# Altium PCB CAR PCB.PcbDoc
Units mm, origin at the board's own origin, x right, y up, seen from the top; angles counter-clockwise.
Board outline 175.18 x 129.51 mm, 2 copper layers (F.Cu, B.Cu); 27 components, 83 nets, 179 pads, 279 vias.
Unrouted connection lines stored in the file: 35.
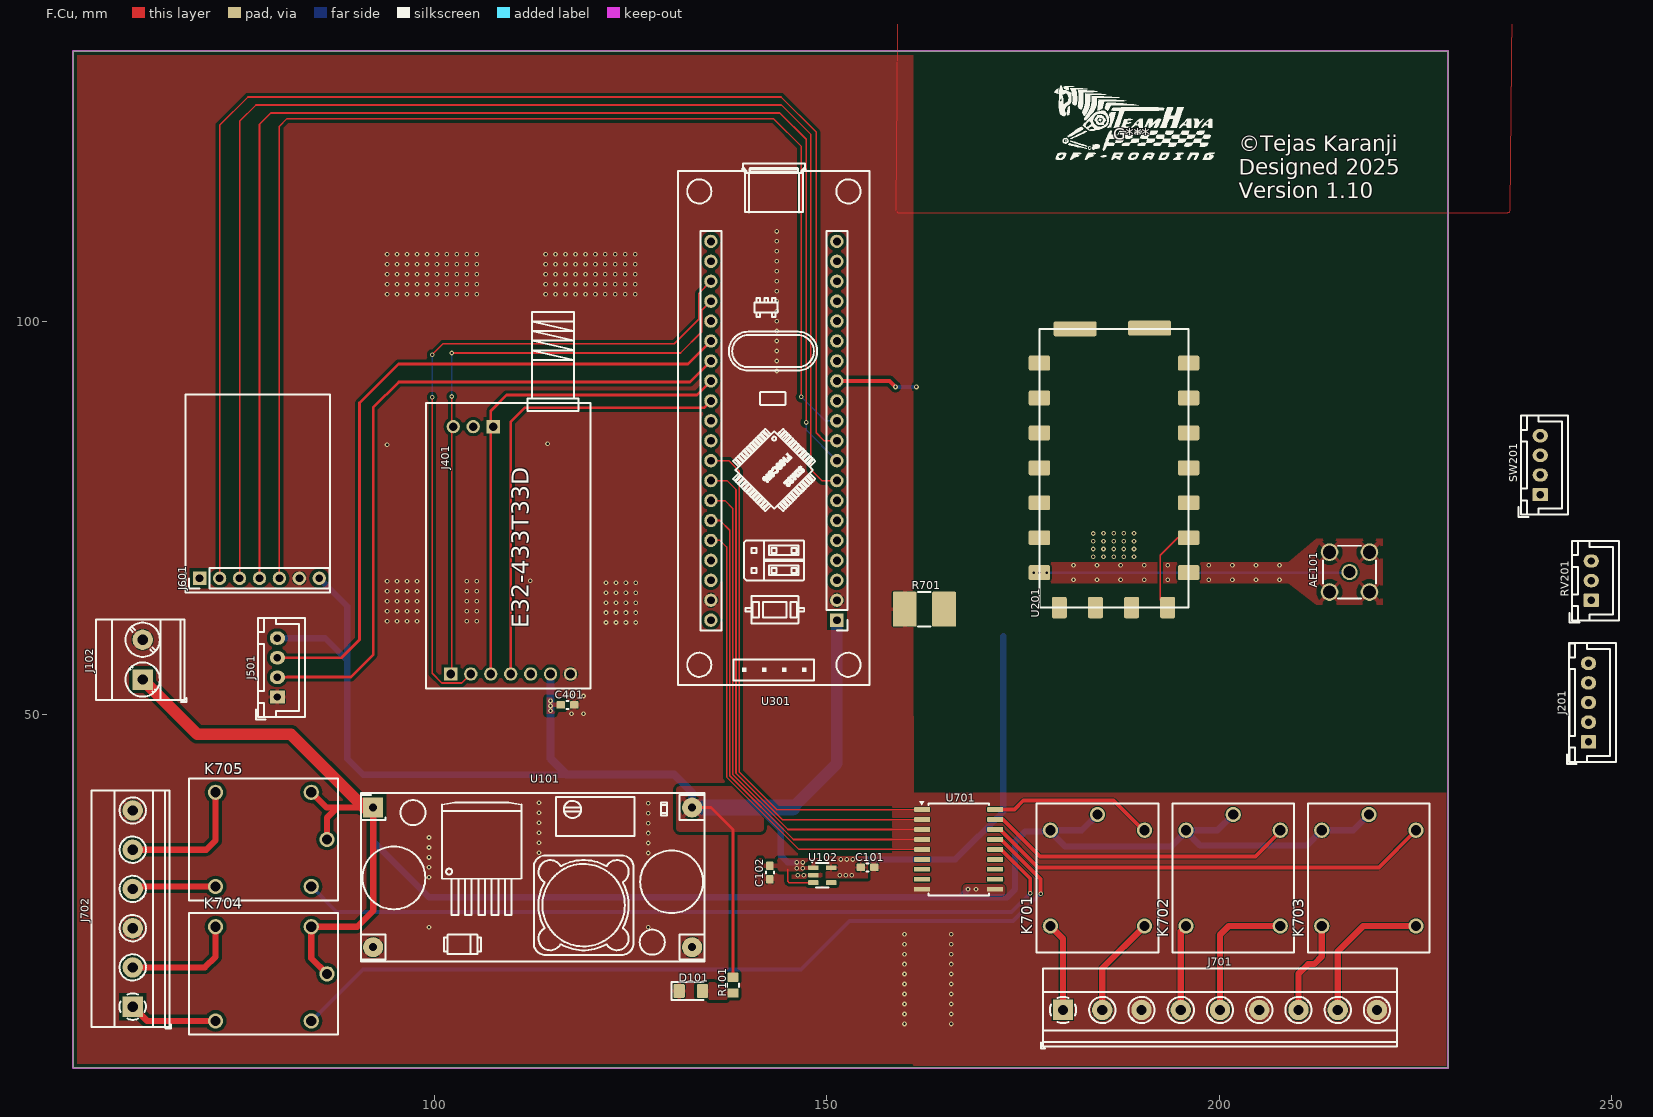
[diagram p0: F.Cu view]
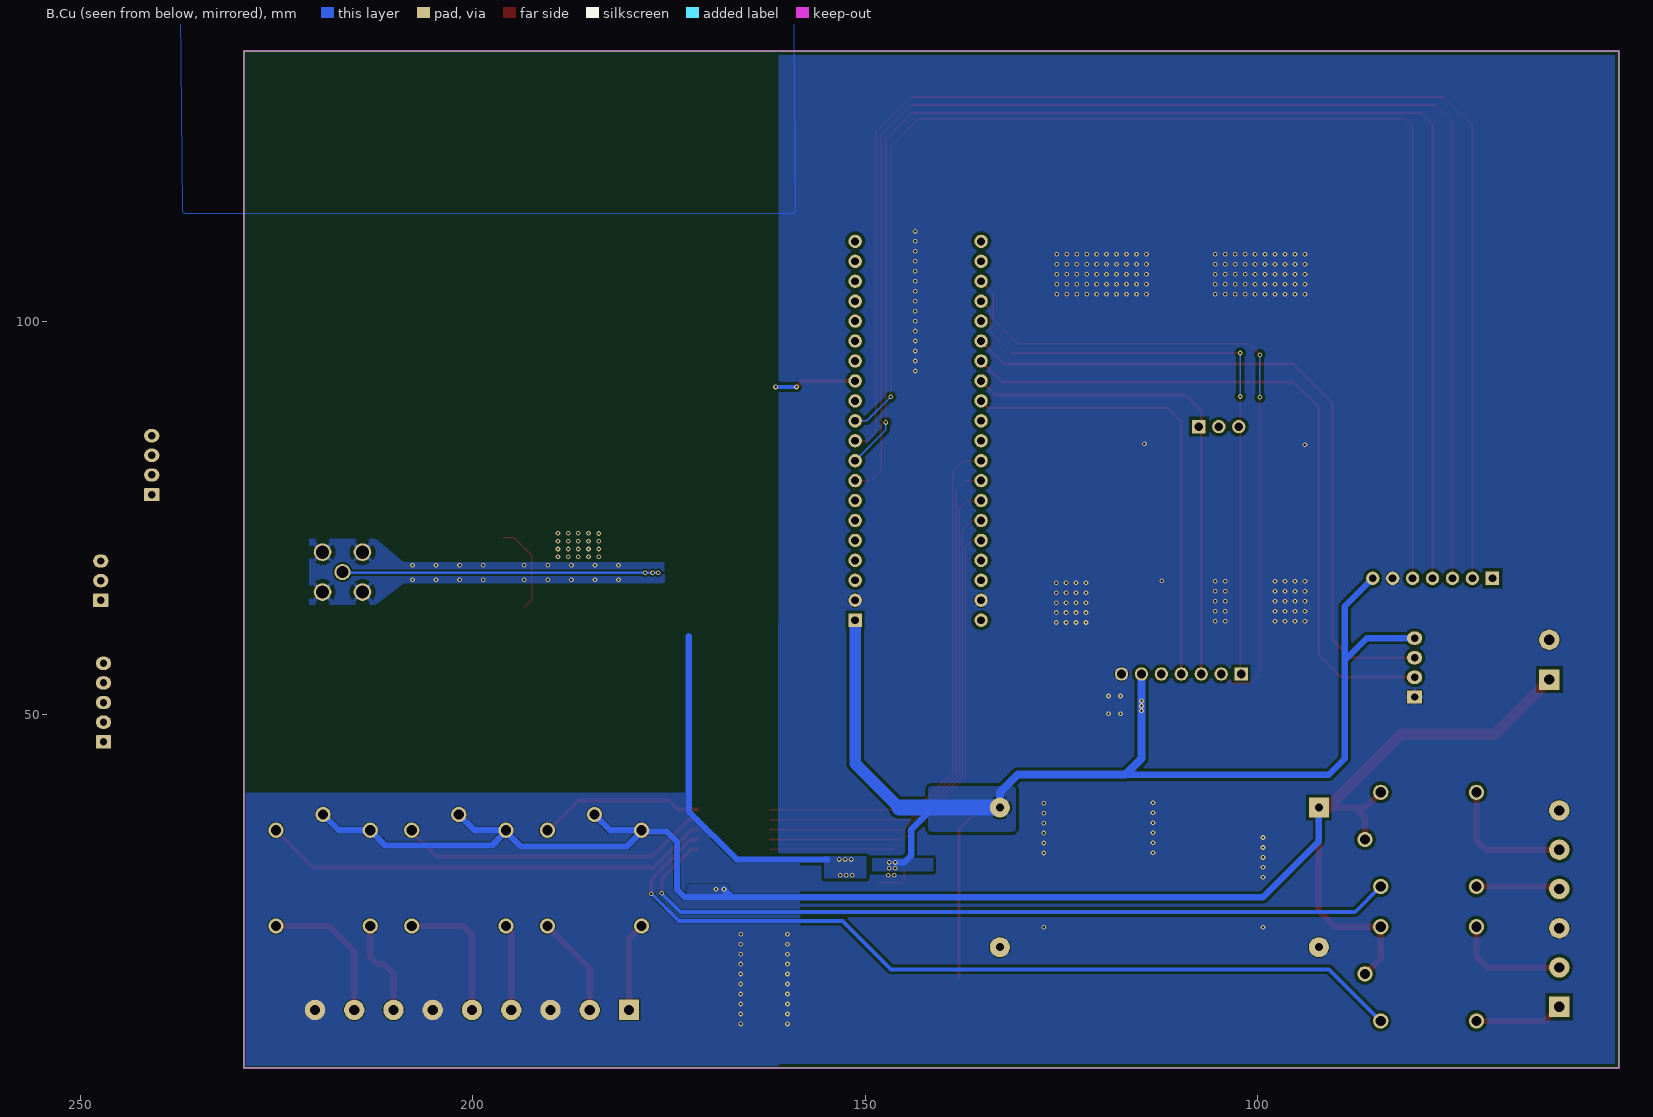
[diagram p1: B.Cu view, seen from below]

## Layer stack, top to bottom
F.Mask: solder mask 0.0102, Solder Resist, Dk 3.5
F.Cu: signal copper 0.0356
Dielectric 1: dielectric 0.32, FR-4, Dk 4.8
B.Cu: signal copper 0.0356
B.Mask: solder mask 0.0102, Solder Resist, Dk 3.5

## Board outline
53.988,134.468 53.988,4.953 229.171,4.953 229.171,134.468 53.988,134.468

## Design rules (kind name [scope] priority, off if disabled: settings)
Clearance "Clearence 0.4_Polygon" [InNamedPolygon('F.Cu-Net-(D101-A)') OR InNamedPolygon('F.Cu-GNDD') OR InNamedPolygon('B.Cu-GNDD')] p1: gap=0.4 ignorepadtopadclearanceinfootprint=FALSE
Clearance "Clearence 0.25_Polygon" [InNamedPolygon('F.Cu-5V') OR InNamedPolygon('F.Cu-GNDA') OR InNamedPolygon('B.Cu-GNDA') OR InNamedPolygon('F.Cu-5V-1') OR InNamedPolygon('B.Cu-5V') OR InNamedPolygon('F.Cu-5V-2') OR InNamedPolygon('B.Cu-5V-1')] p2: gap=0.25 ignorepadtopadclearanceinfootprint=FALSE
Clearance "Clearence 0.15_Polygon" [InNamedPolygon('F.Cu-3.3V') OR InNamedPolygon('B.Cu-3.3V')] p3: gap=0.15 ignorepadtopadclearanceinfootprint=FALSE
Clearance "Clearence 0.1_Polygon" [InNamedPolygon('F.Cu-+12V') OR InNamedPolygon('B.Cu-+12V') OR InNamedPolygon('F.Cu-GNDD-1') OR InNamedPolygon('B.Cu-GNDD-1') OR InNamedPolygon('F.Cu-GNDD-2') OR InNamedPolygon('B.Cu-GNDD-2')] p4: gap=0.1 ignorepadtopadclearanceinfootprint=FALSE
MinimumSolderMaskSliver [All] p1: minsoldermaskwidth=0
PolygonConnect Polygon_B.Cu-3.3V_ConnectDirect [IsNamedPolygon('B.Cu-3.3V') vs IsVia] p1: connectstyle=Direct reliefconductorwidth=0.254 reliefentries=4 polygonreliefangle="90 Angle" airgapwidth=0.254
PolygonConnect Polygon_B.Cu-3.3V_ConnectRelief45 [IsNamedPolygon('B.Cu-3.3V') vs (IsThruPin or IsSMTPin) and (PadShape_AllLayers = 'Round')] p2: connectstyle=Relief reliefconductorwidth=0.3 reliefentries=4 polygonreliefangle="45 Angle" airgapwidth=0.15
PolygonConnect Polygon_B.Cu-3.3V_ConnectRelief90 [IsNamedPolygon('B.Cu-3.3V') vs (IsThruPin or IsSMTPin) and (PadShape_AllLayers <> 'Round')] p3: connectstyle=Relief reliefconductorwidth=0.3 reliefentries=4 polygonreliefangle="90 Angle" airgapwidth=0.15
PolygonConnect Polygon_F.Cu-3.3V_ConnectDirect [IsNamedPolygon('F.Cu-3.3V') vs IsVia] p4: connectstyle=Direct reliefconductorwidth=0.254 reliefentries=4 polygonreliefangle="90 Angle" airgapwidth=0.254
PolygonConnect Polygon_F.Cu-3.3V_ConnectRelief45 [IsNamedPolygon('F.Cu-3.3V') vs (IsThruPin or IsSMTPin) and (PadShape_AllLayers = 'Round')] p5: connectstyle=Relief reliefconductorwidth=0.3 reliefentries=4 polygonreliefangle="45 Angle" airgapwidth=0.15
PolygonConnect Polygon_F.Cu-3.3V_ConnectRelief90 [IsNamedPolygon('F.Cu-3.3V') vs (IsThruPin or IsSMTPin) and (PadShape_AllLayers <> 'Round')] p6: connectstyle=Relief reliefconductorwidth=0.3 reliefentries=4 polygonreliefangle="90 Angle" airgapwidth=0.15
PolygonConnect Polygon_B.Cu-GNDD-2_ConnectDirect [IsNamedPolygon('B.Cu-GNDD-2')] p7: connectstyle=Direct reliefconductorwidth=0.254 reliefentries=4 polygonreliefangle="90 Angle" airgapwidth=0.254
PolygonConnect Polygon_F.Cu-GNDD-2_ConnectDirect [IsNamedPolygon('F.Cu-GNDD-2')] p8: connectstyle=Direct reliefconductorwidth=0.254 reliefentries=4 polygonreliefangle="90 Angle" airgapwidth=0.254
PolygonConnect Polygon_B.Cu-GNDD-1_ConnectDirect [IsNamedPolygon('B.Cu-GNDD-1')] p9: connectstyle=Direct reliefconductorwidth=0.254 reliefentries=4 polygonreliefangle="90 Angle" airgapwidth=0.254
PolygonConnect Polygon_F.Cu-GNDD-1_ConnectDirect [IsNamedPolygon('F.Cu-GNDD-1')] p10: connectstyle=Direct reliefconductorwidth=0.254 reliefentries=4 polygonreliefangle="90 Angle" airgapwidth=0.254
PolygonConnect Polygon_B.Cu-GNDD_ConnectDirect [IsNamedPolygon('B.Cu-GNDD') vs IsVia] p11: connectstyle=Direct reliefconductorwidth=0.254 reliefentries=4 polygonreliefangle="90 Angle" airgapwidth=0.254
PolygonConnect Polygon_B.Cu-GNDD_ConnectRelief45 [IsNamedPolygon('B.Cu-GNDD') vs (IsThruPin or IsSMTPin) and (PadShape_AllLayers = 'Round')] p12: connectstyle=Relief reliefconductorwidth=0.5 reliefentries=4 polygonreliefangle="45 Angle" airgapwidth=0.1
PolygonConnect Polygon_B.Cu-GNDD_ConnectRelief90 [IsNamedPolygon('B.Cu-GNDD') vs (IsThruPin or IsSMTPin) and (PadShape_AllLayers <> 'Round')] p13: connectstyle=Relief reliefconductorwidth=0.5 reliefentries=4 polygonreliefangle="90 Angle" airgapwidth=0.1
PolygonConnect Polygon_F.Cu-GNDD_ConnectDirect [IsNamedPolygon('F.Cu-GNDD') vs IsVia] p14: connectstyle=Direct reliefconductorwidth=0.254 reliefentries=4 polygonreliefangle="90 Angle" airgapwidth=0.254
PolygonConnect Polygon_F.Cu-GNDD_ConnectRelief45 [IsNamedPolygon('F.Cu-GNDD') vs (IsThruPin or IsSMTPin) and (PadShape_AllLayers = 'Round')] p15: connectstyle=Relief reliefconductorwidth=0.5 reliefentries=4 polygonreliefangle="45 Angle" airgapwidth=0.1
PolygonConnect Polygon_F.Cu-GNDD_ConnectRelief90 [IsNamedPolygon('F.Cu-GNDD') vs (IsThruPin or IsSMTPin) and (PadShape_AllLayers <> 'Round')] p16: connectstyle=Relief reliefconductorwidth=0.5 reliefentries=4 polygonreliefangle="90 Angle" airgapwidth=0.1
PolygonConnect Polygon_B.Cu-5V-1_ConnectDirect [IsNamedPolygon('B.Cu-5V-1') vs IsVia] p17: connectstyle=Direct reliefconductorwidth=0.254 reliefentries=4 polygonreliefangle="90 Angle" airgapwidth=0.254
PolygonConnect Polygon_B.Cu-5V-1_ConnectRelief45 [IsNamedPolygon('B.Cu-5V-1') vs (IsThruPin or IsSMTPin) and (PadShape_AllLayers = 'Round')] p18: connectstyle=Relief reliefconductorwidth=0.5 reliefentries=4 polygonreliefangle="45 Angle" airgapwidth=0.25
PolygonConnect Polygon_B.Cu-5V-1_ConnectRelief90 [IsNamedPolygon('B.Cu-5V-1') vs (IsThruPin or IsSMTPin) and (PadShape_AllLayers <> 'Round')] p19: connectstyle=Relief reliefconductorwidth=0.5 reliefentries=4 polygonreliefangle="90 Angle" airgapwidth=0.25
PolygonConnect Polygon_F.Cu-5V-2_ConnectDirect [IsNamedPolygon('F.Cu-5V-2') vs IsVia] p20: connectstyle=Direct reliefconductorwidth=0.254 reliefentries=4 polygonreliefangle="90 Angle" airgapwidth=0.254
PolygonConnect Polygon_F.Cu-5V-2_ConnectRelief45 [IsNamedPolygon('F.Cu-5V-2') vs (IsThruPin or IsSMTPin) and (PadShape_AllLayers = 'Round')] p21: connectstyle=Relief reliefconductorwidth=0.5 reliefentries=4 polygonreliefangle="45 Angle" airgapwidth=0.25
PolygonConnect Polygon_F.Cu-5V-2_ConnectRelief90 [IsNamedPolygon('F.Cu-5V-2') vs (IsThruPin or IsSMTPin) and (PadShape_AllLayers <> 'Round')] p22: connectstyle=Relief reliefconductorwidth=0.5 reliefentries=4 polygonreliefangle="90 Angle" airgapwidth=0.25
PolygonConnect Polygon_B.Cu-5V_ConnectDirect [IsNamedPolygon('B.Cu-5V') vs IsVia] p23: connectstyle=Direct reliefconductorwidth=0.254 reliefentries=4 polygonreliefangle="90 Angle" airgapwidth=0.254
PolygonConnect Polygon_B.Cu-5V_ConnectRelief45 [IsNamedPolygon('B.Cu-5V') vs (IsThruPin or IsSMTPin) and (PadShape_AllLayers = 'Round')] p24: connectstyle=Relief reliefconductorwidth=0.5 reliefentries=4 polygonreliefangle="45 Angle" airgapwidth=0.5
PolygonConnect Polygon_B.Cu-5V_ConnectRelief90 [IsNamedPolygon('B.Cu-5V') vs (IsThruPin or IsSMTPin) and (PadShape_AllLayers <> 'Round')] p25: connectstyle=Relief reliefconductorwidth=0.5 reliefentries=4 polygonreliefangle="90 Angle" airgapwidth=0.5
PolygonConnect Polygon_F.Cu-5V-1_ConnectDirect [IsNamedPolygon('F.Cu-5V-1') vs IsVia] p26: connectstyle=Direct reliefconductorwidth=0.254 reliefentries=4 polygonreliefangle="90 Angle" airgapwidth=0.254
PolygonConnect Polygon_F.Cu-5V-1_ConnectRelief45 [IsNamedPolygon('F.Cu-5V-1') vs (IsThruPin or IsSMTPin) and (PadShape_AllLayers = 'Round')] p27: connectstyle=Relief reliefconductorwidth=0.5 reliefentries=4 polygonreliefangle="45 Angle" airgapwidth=0.5
PolygonConnect Polygon_F.Cu-5V-1_ConnectRelief90 [IsNamedPolygon('F.Cu-5V-1') vs (IsThruPin or IsSMTPin) and (PadShape_AllLayers <> 'Round')] p28: connectstyle=Relief reliefconductorwidth=0.5 reliefentries=4 polygonreliefangle="90 Angle" airgapwidth=0.5
PolygonConnect Polygon_B.Cu-GNDA_ConnectDirect [IsNamedPolygon('B.Cu-GNDA') vs IsVia] p29: connectstyle=Direct reliefconductorwidth=0.254 reliefentries=4 polygonreliefangle="90 Angle" airgapwidth=0.254
PolygonConnect Polygon_B.Cu-GNDA_ConnectRelief45 [IsNamedPolygon('B.Cu-GNDA') vs (IsThruPin or IsSMTPin) and (PadShape_AllLayers = 'Round')] p30: connectstyle=Relief reliefconductorwidth=0.5 reliefentries=4 polygonreliefangle="45 Angle" airgapwidth=0.5
PolygonConnect Polygon_B.Cu-GNDA_ConnectRelief90 [IsNamedPolygon('B.Cu-GNDA') vs (IsThruPin or IsSMTPin) and (PadShape_AllLayers <> 'Round')] p31: connectstyle=Relief reliefconductorwidth=0.5 reliefentries=4 polygonreliefangle="90 Angle" airgapwidth=0.5
PolygonConnect Polygon_F.Cu-GNDA_ConnectDirect [IsNamedPolygon('F.Cu-GNDA') vs IsVia] p32: connectstyle=Direct reliefconductorwidth=0.254 reliefentries=4 polygonreliefangle="90 Angle" airgapwidth=0.254
PolygonConnect Polygon_F.Cu-GNDA_ConnectRelief45 [IsNamedPolygon('F.Cu-GNDA') vs (IsThruPin or IsSMTPin) and (PadShape_AllLayers = 'Round')] p33: connectstyle=Relief reliefconductorwidth=0.5 reliefentries=4 polygonreliefangle="45 Angle" airgapwidth=0.5
PolygonConnect Polygon_F.Cu-GNDA_ConnectRelief90 [IsNamedPolygon('F.Cu-GNDA') vs (IsThruPin or IsSMTPin) and (PadShape_AllLayers <> 'Round')] p34: connectstyle=Relief reliefconductorwidth=0.5 reliefentries=4 polygonreliefangle="90 Angle" airgapwidth=0.5
PolygonConnect Polygon_B.Cu-+12V_ConnectDirect [IsNamedPolygon('B.Cu-+12V')] p35: connectstyle=Direct reliefconductorwidth=0.254 reliefentries=4 polygonreliefangle="90 Angle" airgapwidth=0.254
PolygonConnect Polygon_F.Cu-+12V_ConnectDirect [IsNamedPolygon('F.Cu-+12V')] p36: connectstyle=Direct reliefconductorwidth=0.254 reliefentries=4 polygonreliefangle="90 Angle" airgapwidth=0.254
PolygonConnect Polygon_F.Cu-Net-(D101-A)_ConnectDirect [IsNamedPolygon('F.Cu-Net-(D101-A)') vs IsVia] p37: connectstyle=Direct reliefconductorwidth=0.254 reliefentries=4 polygonreliefangle="90 Angle" airgapwidth=0.254
PolygonConnect Polygon_F.Cu-Net-(D101-A)_ConnectRelief45 [IsNamedPolygon('F.Cu-Net-(D101-A)') vs (IsThruPin or IsSMTPin) and (PadShape_AllLayers = 'Round')] p38: connectstyle=Relief reliefconductorwidth=0.5 reliefentries=4 polygonreliefangle="45 Angle" airgapwidth=0.1
PolygonConnect Polygon_F.Cu-Net-(D101-A)_ConnectRelief90 [IsNamedPolygon('F.Cu-Net-(D101-A)') vs (IsThruPin or IsSMTPin) and (PadShape_AllLayers <> 'Round')] p39: connectstyle=Relief reliefconductorwidth=0.5 reliefentries=4 polygonreliefangle="90 Angle" airgapwidth=0.1
PolygonConnect Polygon_F.Cu-5V_ConnectDirect [IsNamedPolygon('F.Cu-5V') vs IsVia] p40: connectstyle=Direct reliefconductorwidth=0.254 reliefentries=4 polygonreliefangle="90 Angle" airgapwidth=0.254
PolygonConnect Polygon_F.Cu-5V_ConnectRelief45 [IsNamedPolygon('F.Cu-5V') vs (IsThruPin or IsSMTPin) and (PadShape_AllLayers = 'Round')] p41: connectstyle=Relief reliefconductorwidth=0.5 reliefentries=4 polygonreliefangle="45 Angle" airgapwidth=0.5
PolygonConnect Polygon_F.Cu-5V_ConnectRelief90 [IsNamedPolygon('F.Cu-5V') vs (IsThruPin or IsSMTPin) and (PadShape_AllLayers <> 'Round')] p42: connectstyle=Relief reliefconductorwidth=0.5 reliefentries=4 polygonreliefangle="90 Angle" airgapwidth=0.5
RoutingVias [All] p1: holewidth=0.711 width=1.27 viastyle="Through Hole" minholewidth=0.711 minwidth=1.27 maxholewidth=0.711 maxwidth=1.27
SilkToSilkClearance [All] p1: silktosilkclearance=0
SilkToSolderMaskClearance [IsPad] p1: minsilkscreentomaskgap=0 clearancetoexposedcopper=TRUE
SolderMaskExpansion [All] p1: expansion=0.102 istentingtop=FALSE
Width [All] p1: maxlimit=10 minlimit=0.254 preferedwidth=0.254 minimp=50.000000 maximp=50.000000 favimp=50.000000
27 further rules are at their usual default settings.

## Components (designator, comment, footprint, x,y, rotation, side; value= is the part's Value field where it differs from the comment)
AE101 "Comment" SMA_Amphenol_132134-11_Vertical 216.593,68.103 r90 top value=Antenna_Shield
C101 "Comment" C_0603_1608Metric_Pad1.08x0.95mm_HandSolder 155.194,30.48 r0 top value=1uF
C102 "Comment" C_0603_1608Metric_Pad1.08x0.95mm_HandSolder 142.748,29.819 r270 top value=1uF
C401 "Comment" C_0603_1608Metric_Pad1.08x0.95mm_HandSolder 116.967,51.181 r0 top value=1uF
D101 "Comment" LED_1206_3216Metric_Pad1.42x1.75mm_HandSolder 132.679,14.732 r0 top value=LED
G*** "Comment" LOGO 188.874,124.257 r0 top value=LOGO
J102 "Comment" TerminalBlock_Phoenix_MKDS-3-2-5.08_1x02_P5.08mm_Horizontal 62.84,54.407 r90 top value=Screw_Terminal_01x02
J201 "Comment" JST_XH_B5B-XH-A_1x05_P2.50mm_Vertical 247.04,46.482 r90 top value=XLR5_Ground
J401 "Comment" E32-433T33D-EDITEDSIZE 109.728,82.638 r90 top value="LORA Module E32-433D"
J501 "Comment" JST_XH_B4B-XH-A_1x04_P2.50mm_Vertical 80.01,52.19 r90 top value=Conn_01x04_Socket
J601 "Comment" PinHeader_1x07_P2.54mm_Vertical 70.104,67.31 r90 top value=Conn_01x07_Socket
J701 "Comment" TerminalBlock_Phoenix_MKDS-1,5-9_1x09_P5.00mm_Horizontal 180.091,12.319 r0 top value=Screw_Terminal_01x09
J702 "Comment" TerminalBlock_Phoenix_MKDS-1,5-6_1x06_P5.00mm_Horizontal 61.57,12.737 r90 top value=Screw_Terminal_01x06
K701 "Comment" RELAY_JQC-3F-1C-24VDC 184.485,29.111 r90 top value=JQC-3F-1C-12VDC
K702 "Comment" RELAY_JQC-3F-1C-24VDC 201.772,29.111 r90 top value=JQC-3F-1C-12VDC
K703 "Comment" RELAY_JQC-3F-1C-24VDC 219.06,29.111 r90 top value=JQC-3F-1C-12VDC
K704 "Comment" RELAY_JQC-3F-1C-24VDC 78.228,16.916 r0 top value=JQC-3F-1C-12VDC
K705 "Comment" RELAY_JQC-3F-1C-24VDC 78.228,34.042 r0 top value=JQC-3F-1C-12VDC
R101 "Comment" R_0805_2012Metric_Pad1.20x1.40mm_HandSolder 138.049,15.478 r270 top value=220
R701 "Comment" R_2816_7142Metric 162.433,63.373 r0 top value=R_2816_7142Metric
RV201 "Comment" JST_XH_B3B-XH-A_1x03_P2.50mm_Vertical 247.396,64.516 r90 top value=10k
SW201 "Comment" JST_XH_B4B-XH-A_1x04_P2.50mm_Vertical 240.894,77.978 r90 top value=SW_Slide_DPDT
U101 "Comment" DCDC_StepDown_LM2596 92.202,38.1 r0 top value="DC DC_StepDown_LM2596"
U102 "Comment" SOT-23-5 149.43,29.497 r0 top value=AP2112K-3.3
U201 "Comment" SA868 177.088,63.582 r90 top value=~
U301 "Comment" usethis_BlackPill_1 152.146,61.976 r180 top value=BlackPill_Part_Like_SWD_Breakout
U701 "Comment" SOIC-18W_7.5x11.6mm_P1.27mm 166.8,32.766 r0 top value=ULN2803A

## Footprints (in the part's own frame and the unit in brackets; to place one, negate y for a bottom-side part, rotate by r counter-clockwise, add the part's x,y. Pads: shape width x height; smd on the part's side, far side on the other; paste and mask are expansions set on the pad)
C_0603_1608Metric_Pad1.08x0.95mm_HandSolder [mm]
  rrect25% 1.075x0.95 smd mask+0: 1(-0.863,0) 2(0.863,0)
  silkscreen extent -0.15,-0.51 0.15,0.51
DCDC_StepDown_LM2596 [mm]
  rect 2.54x2.54 hole 1 paste-2539.97 mask+0: 1(0,0)
  round 2.54 hole 1 paste-2539.97 mask+0: 2(0,-17.78) 3(40.64,-17.78) 4(40.64,0)
  silkscreen extent -1.56,-19.62 42.22,1.84
E32-433T33D-EDITEDSIZE [mm]
  rect 1.7x1.7 hole 1.1 paste-2539.97 mask+0: 1(-27.52,7.62) 12(4,2.24)
  round 1.7 hole 1.1 paste-2539.97 mask+0: 2(-27.52,5.08) 3(-27.52,2.54) 4(-27.52,0) 5(-27.52,-2.54) 6(-27.52,-5.08) 7(-27.52,-7.62) 13(4,4.78) 14(4,7.32)
  silkscreen extent -29.34,-10.18 18.6,10.82
JST_XH_B3B-XH-A_1x03_P2.50mm_Vertical [mm]
  rrect15% 1.7x1.95 hole 0.95 paste-2539.97 mask+0: 1(0,0)
  rrect100% 1.7x1.95 hole 0.95 paste-2539.97 mask+0: 2(2.5,0) 3(5,0)
  silkscreen extent -2.85,-3.51 7.56,2.75
JST_XH_B4B-XH-A_1x04_P2.50mm_Vertical [mm]
  rrect15% 1.7x1.95 hole 0.95 paste-2539.97 mask+0: 1(0,0)
  rrect100% 1.7x1.95 hole 0.95 paste-2539.97 mask+0: 2(2.5,0) 3(5,0) 4(7.5,0)
  silkscreen extent -2.85,-3.51 10.06,2.75
JST_XH_B5B-XH-A_1x05_P2.50mm_Vertical [mm]
  rrect15% 1.7x1.95 hole 0.95 paste-2539.97 mask+0: 1(0,0)
  rrect100% 1.7x1.95 hole 0.95 paste-2539.97 mask+0: 2(2.5,0) 3(5,0) 4(7.5,0) 5(10,0)
  silkscreen extent -2.85,-3.51 12.56,2.75
LED_1206_3216Metric_Pad1.42x1.75mm_HandSolder [mm]
  rrect18% 1.425x1.75 smd mask+0: 1(-1.488,0) 2(1.488,0)
  silkscreen extent -2.46,-1.13 1.6,1.13
LOGO [mm]
  silkscreen extent -9.89,-3.65 10.54,5.89
PinHeader_1x07_P2.54mm_Vertical [mm]
  rect 1.7x1.7 hole 1 paste-2539.97 mask+0: 1(0,0)
  rrect100% 1.7x1.7 hole 1 paste-2539.97 mask+0: 2(0,-2.54) 3(0,-5.08) 4(0,-7.62) 5(0,-10.16) 6(0,-12.7) 7(0,-15.24)
  silkscreen extent -1.33,-16.57 1.33,1.33
R_0805_2012Metric_Pad1.20x1.40mm_HandSolder [mm]
  rrect21% 1.2x1.4 smd mask+0: 1(-1,0) 2(1,0)
  silkscreen extent -0.23,-0.73 0.23,0.73
R_2816_7142Metric [mm]
  rrect8% 3.025x4.45 smd mask+0: 1(-2.512,0) 2(2.512,0)
  silkscreen extent -0.8,-2.21 0.8,2.21
RELAY_JQC-3F-1C-24VDC [mm]
  round 1.95 hole 1.3 paste-2539.97 mask+0.102: COIL1(6.1,6) COIL2(6.1,-6) COM(8.1,0) NC(-6.1,-6) NO(-6.1,6)
  silkscreen extent -9.5,-7.75 9.5,7.75
SA868 [mm]
  rrect25% 1.9x2.75 smd mask+0: 1(31.15,-19) 2(26.7,-19) 3(22.25,-19) 4(17.8,-19) 5(13.35,-19) 6(8.9,-19) 7(4.45,-19) 12(4.45,0) 13(8.9,0) 14(13.35,0) 15(17.8,0) 16(22.25,0) 17(26.7,0) 18(31.15,0)
  rrect25% 2.75x1.9 smd mask+0: 8(0,-16.34) 9(0,-11.74) 10(0,-7.14) 11(0,-2.54)
  rrect25% 1.9x5.5 smd mask+0: Un1(35.51,-4.55) Un2(35.6,-14.04)
  silkscreen extent 0,-19 35.5,0
SMA_Amphenol_132134-11_Vertical [mm]
  round 2.05 hole 1.5 paste-2539.97 mask+0: 1(0,0)
  round 2.25 hole 1.7 paste-2539.97 mask+0: 2(-2.54,-2.54) 2(-2.54,2.54) 2(2.54,-2.54) 2(2.54,2.54)
  silkscreen extent -3.35,-3.35 3.35,3.35
SOIC-18W_7.5x11.6mm_P1.27mm [mm]
  rrect25% 2.05x0.6 smd mask+0: 1(-4.65,5.08) 2(-4.65,3.81) 3(-4.65,2.54) 4(-4.65,1.27) 5(-4.65,0) 6(-4.65,-1.27) 7(-4.65,-2.54) 8(-4.65,-3.81) 9(-4.65,-5.08) 10(4.65,-5.08) 11(4.65,-3.81) 12(4.65,-2.54) 13(4.65,-1.27) 14(4.65,0) 15(4.65,1.27) 16(4.65,2.54) 17(4.65,3.81) 18(4.65,5.08)
  silkscreen extent -5.05,-5.88 3.86,6.11
SOT-23-5 [mm]
  rrect25% 1.325x0.6 smd mask+0: 1(-1.138,0.95) 2(-1.138,0) 3(-1.138,-0.95) 4(1.138,-0.95) 5(1.138,0.95)
  silkscreen extent -1.54,-1.56 0.8,1.84
TerminalBlock_Phoenix_MKDS-1,5-6_1x06_P5.00mm_Horizontal [mm]
  rect 2.6x2.6 hole 1.3 paste-2539.97 mask+0: 1(0,0)
  round 2.6 hole 1.3 paste-2539.97 mask+0: 2(5,0) 3(10,0) 4(15,0) 5(20,0) 6(25,0)
  silkscreen extent -2.8,-4.9 27.56,5.26
TerminalBlock_Phoenix_MKDS-1,5-9_1x09_P5.00mm_Horizontal [mm]
  rect 2.6x2.6 hole 1.3 paste-2539.97 mask+0: 1(0,0)
  round 2.6 hole 1.3 paste-2539.97 mask+0: 2(5,0) 3(10,0) 4(15,0) 5(20,0) 6(25,0) 7(30,0) 8(35,0) 9(40,0)
  silkscreen extent -2.8,-4.9 42.56,5.26
TerminalBlock_Phoenix_MKDS-3-2-5.08_1x02_P5.08mm_Horizontal [mm]
  rect 2.6x2.6 hole 1.3 paste-2539.97 mask+0: 1(0,0)
  round 2.6 hole 1.3 paste-2539.97 mask+0: 2(5.08,0)
  silkscreen extent -2.84,-5.6 7.68,5.96
usethis_BlackPill_1 [mm]
  round 1.7 hole 1 paste-2539.97 mask+0: 1(16.915,-48.26) 2(16.915,-45.72) 3(16.915,-43.18) 4(16.915,-40.64) 5(16.915,-38.1) 6(16.915,-35.56) 7(16.915,-33.02) 8(16.915,-30.48) 9(16.915,-27.94) 10(16.915,-25.4) 11(16.915,-22.86) 12(16.915,-20.32) 13(16.915,-17.78) 14(16.915,-15.24) 15(16.915,-12.7) 16(16.915,-10.16) 17(16.915,-7.62) 18(16.915,-5.08) 19(16.915,-2.54) 20(16.915,0) 21(0.865,-48.26) 22(0.865,-45.72) 23(0.865,-43.18) 24(0.865,-40.64) 25(0.865,-38.1) 26(0.865,-35.56) 27(0.865,-33.02) 28(0.865,-30.48) 29(0.865,-27.94) 30(0.865,-25.4) 31(0.865,-22.86) 32(0.865,-20.32) 33(0.865,-17.78) 34(0.865,-15.24) 35(0.865,-12.7) 36(0.865,-10.16) 37(0.865,-7.62) 38(0.865,-5.08) 39(0.865,-2.54)
  rect 1.7x1.7 hole 1 paste-2539.97 mask+0: 40(0.865,0)
  silkscreen extent -3.3,-58.19 21.08,8.26

## Part data
AE101: library part SMA_Amphenol_132134-11_Vertical, "https://www.amphenolrf.com/downloads/dl/file/id/3406/product/2975/132134_11_customer_drawing.pdf", Footprint=Connector_Coaxial:SMA_Amphenol_132134-11_Vertical, Description="Antenna with extra pin for shielding"
C101 C102 C401: library part C_0603_1608Metric_Pad1.08x0.95mm_HandSolder, "Capacitor SMD 0603 (1608 Metric), square (rectangular) end terminal, IPC_7351 nominal with elongated pad for handsoldering. (Body size source: IPC-SM-782 page 76, https://www.pcb-3d.com/wordpress/wp-content/uploads/ipc-sm-782a_amendment_1_and_2.pdf), generated with kicad-footprint-generator", Footprint=Capacitor_SMD:C_0603_1608Metric_Pad1.08x0.95mm_HandSolder, Description="Unpolarized capacitor", ki_fp_filters=C_*
D101: library part LED_1206_3216Metric_Pad1.42x1.75mm_HandSolder, "LED SMD 1206 (3216 Metric), square (rectangular) end terminal, IPC_7351 nominal, (Body size source: http://www.tortai-tech.com/upload/download/2011102023233369053.pdf), generated with kicad-footprint-generator", Footprint=LED_SMD:LED_1206_3216Metric_Pad1.42x1.75mm_HandSolder, Description="Light emitting diode", ki_fp_filters="LED* LED_SMD:* LED_THT:*"
G***: library part LOGO
J102: library part TerminalBlock_Phoenix_MKDS-3-2-5.08_1x02_P5.08mm_Horizontal, "Terminal Block Phoenix MKDS-3-2-5.08, 2 pins, pitch 5.08mm, size 10.2x11.2mm^2, drill diamater 1.3mm, pad diameter 2.6mm, see http://www.farnell.com/datasheets/2138224.pdf, script-generated using https://github.com/pointhi/kicad-footprint-generator/scripts/TerminalBlock_Phoenix", Footprint=TerminalBlock_Phoenix:TerminalBlock_Phoenix_MKDS-3-2-5.08_1x02_P5.08mm_Horizontal, Description="Generic screw terminal, single row, 01x02, script generated (kicad-library-utils/schlib/autogen/connector/)", ki_fp_filters=TerminalBlock*:*
J201: library part JST_XH_B5B-XH-A_1x05_P2.50mm_Vertical, "JST XH series connector, B5B-XH-A (http://www.jst-mfg.com/product/pdf/eng/eXH.pdf), generated with kicad-footprint-generator", Footprint=Connector_JST:JST_XH_B5B-XH-A_1x05_P2.50mm_Vertical, Description="XLR Connector, Male or Female, 5 Pins, Discrete Ground Pin", ki_fp_filters=Jack*XLR*
J401: library part E32-433T33D-EDITEDSIZE, Footprint="LORA Modules - Kicad:E32-433T33D-EDITEDSIZE", Description="Generic connector, single row, 01x07, script generated", ki_fp_filters=Connector*:*_1x??_*
J501 SW201: library part JST_XH_B4B-XH-A_1x04_P2.50mm_Vertical, "JST XH series connector, B4B-XH-A (http://www.jst-mfg.com/product/pdf/eng/eXH.pdf), generated with kicad-footprint-generator", Footprint=Connector_JST:JST_XH_B4B-XH-A_1x04_P2.50mm_Vertical
  J501: Description="Generic connector, single row, 01x04, script generated", ki_fp_filters=Connector*:*_1x??_*
  SW201: Description="Slide Switch, dual pole double throw"
J601: library part PinHeader_1x07_P2.54mm_Vertical, "Through hole straight pin header, 1x07, 2.54mm pitch, single row", Footprint=Connector_PinHeader_2.54mm:PinHeader_1x07_P2.54mm_Vertical, Description="Generic connector, single row, 01x07, script generated", ki_fp_filters=Connector*:*_1x??_*
J701: library part TerminalBlock_Phoenix_MKDS-1,5-9_1x09_P5.00mm_Horizontal, "Terminal Block Phoenix MKDS-1,5-9, 9 pins, pitch 5mm, size 45x9.8mm^2, drill diamater 1.3mm, pad diameter 2.6mm, see http://www.farnell.com/datasheets/100425.pdf, script-generated using https://github.com/pointhi/kicad-footprint-generator/scripts/TerminalBlock_Phoenix", Footprint=TerminalBlock_Phoenix:TerminalBlock_Phoenix_MKDS-1,5-9_1x09_P5.00mm_Horizontal, Description="Generic screw terminal, single row, 01x09, script generated (kicad-library-utils/schlib/autogen/connector/)", ki_fp_filters=TerminalBlock*:*
J702: library part TerminalBlock_Phoenix_MKDS-1,5-6_1x06_P5.00mm_Horizontal, "Terminal Block Phoenix MKDS-1,5-6, 6 pins, pitch 5mm, size 30x9.8mm^2, drill diamater 1.3mm, pad diameter 2.6mm, see http://www.farnell.com/datasheets/100425.pdf, script-generated using https://github.com/pointhi/kicad-footprint-generator/scripts/TerminalBlock_Phoenix", Footprint=TerminalBlock_Phoenix:TerminalBlock_Phoenix_MKDS-1,5-6_1x06_P5.00mm_Horizontal, Description="Generic screw terminal, single row, 01x06, script generated (kicad-library-utils/schlib/autogen/connector/)", ki_fp_filters=TerminalBlock*:*
K701 K702 K703 K704 K705: library part RELAY_JQC-3F-1C-24VDC, MAXIMUM_PACKAGE_HEIGHT="15.5 mm", Package=None, MANUFACTURER="YUEQING HENGWEI ELECTRONICS CO.,LTD.", Footprint=Relay_THT:RELAY_JQC-3F-1C-24VDC, MF="YUEQING HENGWEI ELECTRONICS CO.,LTD.", Price=None, Check_prices=https://www.snapeda.com/parts/JQC-3F-1C-24VDC/YUEQING+HENGWEI+ELECTRONICS+CO.%252CLTD./view-part/?ref=eda, STANDARD="Manufacturer Recommendations", PARTREV=N/A, SnapEDA_Link=https://www.snapeda.com/parts/JQC-3F-1C-24VDC/YUEQING+HENGWEI+ELECTRONICS+CO.%252CLTD./view-part/?ref=snap, MP=JQC-3F-1C-24VDC, Description_1="\n                        \n                            Miniature PCB Relay 24VDC, 10A 250VAC, 15A 125VAC, 10A 250VAC\n                        \n", Availability="Not in stock"
R101: library part R_0805_2012Metric_Pad1.20x1.40mm_HandSolder, "Resistor SMD 0805 (2012 Metric), square (rectangular) end terminal, IPC_7351 nominal with elongated pad for handsoldering. (Body size source: IPC-SM-782 page 72, https://www.pcb-3d.com/wordpress/wp-content/uploads/ipc-sm-782a_amendment_1_and_2.pdf), generated with kicad-footprint-generator", Footprint=Resistor_SMD:R_0805_2012Metric_Pad1.20x1.40mm_HandSolder, Description=Resistor, ki_fp_filters=R_*
R701: library part R_2816_7142Metric, "Resistor SMD 2816 (7142 Metric), square (rectangular) end terminal, IPC_7351 nominal, (Body size from: https://www.vishay.com/docs/30100/wsl.pdf), generated with kicad-footprint-generator", Footprint=Resistor_SMD:R_2816_7142Metric
RV201: library part JST_XH_B3B-XH-A_1x03_P2.50mm_Vertical, "JST XH series connector, B3B-XH-A (http://www.jst-mfg.com/product/pdf/eng/eXH.pdf), generated with kicad-footprint-generator", Footprint=Connector_JST:JST_XH_B3B-XH-A_1x03_P2.50mm_Vertical, Description="Log Potentiometer", ki_fp_filters=Potentiometer*
U101: library part DCDC_StepDown_LM2596, Footprint="DC DC Modules:DCDC_StepDown_LM2596", Description="module : adjustable step down module 3.2V-40V to 1.25V-35V 3A"
U102: library part SOT-23-5, "SOT, 5 Pin (https://www.jedec.org/sites/default/files/docs/Mo-178c.PDF variant AA), generated with kicad-footprint-generator ipc_gullwing_generator.py", Footprint=Package_TO_SOT_SMD:SOT-23-5, Datasheet=https://www.diodes.com/assets/Datasheets/AP2112.pdf, Description="600mA low dropout linear regulator, with enable pin, 3.8V-6V input voltage range, 3.3V fixed positive output, SOT-23-5", ki_fp_filters=SOT?23?5*
U201: library part SA868, Footprint=RF:SA868
U301: library part usethis_BlackPill_1, "BlackPill module with pin headers and sockets. No SWD breakout", Footprint="STM32 Eval Boards:usethis_BlackPill_1", Description="STM32 Blue Pill ; KLC compliant"
U701: library part SOIC-18W_7.5x11.6mm_P1.27mm, "SOIC, 18 Pin (JEDEC MS-013AB, https://www.analog.com/media/en/package-pcb-resources/package/33254132129439rw_18.pdf), generated with kicad-footprint-generator ipc_gullwing_generator.py", Footprint=Package_SO:SOIC-18W_7.5x11.6mm_P1.27mm, Datasheet=http://www.ti.com/lit/ds/symlink/uln2803a.pdf, Description="Darlington Transistor Arrays, SOIC18/DIP18", ki_fp_filters="DIP*W7.62mm* SOIC*7.5x11.6mm*P1.27mm*"

## Via types
v1: diameter 0.6, hole 0.3, F.Cu to B.Cu, tented both sides, 279 vias

## Nets (pads, with @x,y where several pads share a name; then routed paths per layer and width w, separated by ;. In a path a pad name is that pad's centre, name@x,y a point inside that pad or via, vN(x,y) a via of type N, cw(c..) or ccw(c..) an arc to the next point about the centre after c; other vN are vias at no path point)
3.3V: C101.1 U102.5 | length 42.5
  B.Cu w0.8: 154.813,31.496 166.37,31.496 172.466,37.592 172.466,59.944
  other v1: 151.638,29.464 152.4,29.464 153.162,29.464 151.765,31.496 152.527,31.496 153.289,31.496
5V: C102.1 C401.1 J401.6 J501.4 J601.7 R101.1 U101.4 U102.1 U102.3 U201.6 U201.8 U301.40 | length 186.1
  F.Cu w0.2: 145.034,30.226 145.034,28.702 145.189,28.547 U102.3 ; U201.8 192.478,64.531 192.478,70.247 194.713,72.482 U201.6
  F.Cu w0.35: U101.4 135.255,38.1 138.049,35.306 R101.1
  B.Cu w0.8: J501.4 86.106,59.69 88.9,56.896 ; J601.7 88.9,63.754 88.9,56.896 ; 116.84,42.316 116.815,42.291 90.932,42.291 88.9,44.323 88.9,56.896 ; 141.351,38.1 144.145,35.306 144.145,32.004 145.034,31.115 v1(146.177,31.115)
  B.Cu w1: J401.6 v1(114.808,51.689) v1(114.808,51.054) v1(114.808,50.419) 114.808,44.348 116.84,42.316 130.556,42.316 132.842,40.03 U101.4
  B.Cu w1.5: 145.669,38.1 151.281,43.712 U301.40
  B.Cu w2: U101.4 139.065,38.1 143.002,38.1 144.653,38.1 145.669,38.1
  other v1: 146.177,30.353 146.939,30.353 146.939,31.115
+3.3V: U301.20
+12V: J102.1 K701.COIL1 K701.COM K702.COIL1 K702.COM K703.COIL1 K703.COM K704.COIL1 K704.COM K705.COIL1 K705.COM U101.1 U701.10 | length 245.8
  F.Cu w0.8: K705.COIL1 86.27,38.1 U101.1 ; K704.COM 84.328,18.916 K704.COIL1 90.176,22.916 92.202,24.943 U101.1 ; K705.COM 86.328,36.798 87.63,38.1 U101.1
  F.Cu w1.5: J102.1 69.799,47.447 81.737,47.447 91.084,38.1 U101.1
  B.Cu w0.8: U101.1 92.202,33.779 99.316,26.665 164.084,26.665 ; v1(167.996,27.686) 166.975,26.665 164.084,26.665 ; K701.COIL1 182.484,35.211 K701.COM ; K702.COIL1 199.772,35.211 K702.COM ; K703.COM 217.059,35.211 K703.COIL1 211.122,33.274 197.55,33.274 195.772,35.052 193.867,33.147 180.389,33.147 178.484,35.052 175.26,35.052 173.99,33.782 173.99,27.686 172.969,26.665 164.084,26.665
  other v1: 169.012,27.686
/Display/UART_RX: J501.3 U301.6 | length 89.6
  F.Cu w0.35: J501.3 88.178,57.19 90.475,59.487 90.475,89.662 95.428,94.615 132.31,94.615 U301.6
/Display/UART_TX: J501.2 U301.7 | length 90.4
  F.Cu w0.35: J501.2 81.185,54.69 81.232,54.737 89.383,54.737 92.202,57.556 92.202,89.052 95.479,92.329 132.564,92.329 U301.7
/LORA/UART_RX: J401.3 U301.8 | length 63.1
  F.Cu w0.35: J401.3 107.188,88.646 109.22,90.678 133.453,90.678 U301.8
/LORA/UART_TX: J401.4 U301.9 | length 58.7
  F.Cu w0.35: J401.4 109.728,87.249 111.506,89.027 134.342,89.027 U301.9
ANTENNA_LINE: AE101.1 U201.12 | length 40.5
  B.Cu w0.35: v1@176.453,68.024 v1(176.351,68.024) 176.351,67.922 176.461,68.032 178.02,68.032 v1(178.028,68.024) 178.036,68.032 216.522,68.032 AE101.1
  other v1: 177.088,68.032
AUX: J401.5
CS: J601.5 U301.30 | length 163.6
  F.Cu w0.2: J601.5 80.264,124.917 81.178,125.832 143.256,125.832 146.771,122.317 v1(146.761,90.424) v1@146.771,90.434
  B.Cu w0.2: v1(146.761,90.424) 149.809,87.376 U301.30
GNDA: AE101.2 J201.3 J201.5 R701.2 RV201.1 SW201.4 U201.9 U201.10
  other v1: 198.678,67.112 201.678,67.112 204.678,67.112 207.678,67.112 181.431,67.138 184.431,67.138 187.431,67.138 190.431,67.138 193.431,67.138 198.678,68.964 201.678,68.964 204.678,68.964 207.678,68.964 181.431,68.989 184.431,68.989 187.431,68.989 190.431,68.989 193.431,68.989 183.946,70.043 185.246,70.043 186.546,70.043 187.846,70.043 189.146,70.043 183.946,71.043 185.246,71.043 186.546,71.043 187.846,71.043 189.146,71.043 183.946,72.043 185.246,72.043 186.546,72.043 187.846,72.043 189.146,72.043 183.946,73.028 185.246,73.043 186.546,73.043 187.846,73.043 189.146,73.043
GNDD: C101.2 C102.2 C401.2 D101.1 J102.2 J401.7 J501.1 J601.6 J701.3 J701.6 J701.9 J702.3 J702.6 R701.1 U101.2 U101.3 U102.2 U301.19 U301.39 U701.9
  other v1: 159.893,10.541 165.862,10.541 159.893,11.811 165.862,11.811 159.893,13.081 165.862,13.081 159.893,14.351 165.862,14.351 159.893,15.621 165.862,15.621 159.893,16.891 165.862,16.891 159.893,18.161 165.862,18.161 159.893,19.431 165.862,19.431 159.893,20.701 165.862,20.701 159.893,21.971 165.862,21.971 99.314,22.86 127.254,22.86 99.314,29.21 146.304,29.464 147.066,29.464 99.314,30.48 99.314,31.75 127.254,32.309 113.335,32.36 99.314,33.02 127.254,33.579 113.335,33.63 99.314,34.29 127.254,34.849 113.335,34.9 127.254,36.119 113.335,36.17 127.254,37.389 113.335,37.44 127.254,38.659 113.335,38.71 117.475,50.038 118.999,50.038 117.475,52.324 118.999,52.324 121.869,61.671 123.139,61.671 124.409,61.671 125.679,61.671 93.98,61.849 95.25,61.849 96.52,61.849 97.79,61.849 104.14,61.849 105.41,61.849 121.869,62.941 123.139,62.941 124.409,62.941 125.679,62.941 93.98,63.119 95.25,63.119 96.52,63.119 97.79,63.119 104.14,63.119 105.41,63.119 121.869,64.211 123.139,64.211 124.409,64.211 125.679,64.211 93.98,64.389 95.25,64.389 96.52,64.389 97.79,64.389 104.14,64.389 105.41,64.389 121.869,65.481 123.139,65.481 124.409,65.481 125.679,65.481 93.98,65.659 95.25,65.659 96.52,65.659 97.79,65.659 104.14,65.659 105.41,65.659 121.869,66.751 123.139,66.751 124.409,66.751 125.679,66.751 93.98,66.929 95.25,66.929 96.52,66.929 97.79,66.929 104.14,66.929 105.41,66.929 112.217,67.005 93.98,84.328 114.427,84.455 143.637,93.726 143.637,94.996 143.637,96.266 143.637,97.536 143.637,98.806 143.637,100.076 143.637,101.346 143.637,102.616 93.98,103.505 95.25,103.505 96.52,103.505 97.79,103.505 99.06,103.505 100.33,103.505 101.6,103.505 102.87,103.505 104.14,103.505 105.41,103.505 114.173,103.505 115.443,103.505 116.713,103.505 117.983,103.505 119.253,103.505 120.523,103.505 121.793,103.505 123.063,103.505 124.333,103.505 125.603,103.505 143.637,103.886 93.98,104.775 95.25,104.775 96.52,104.775 97.79,104.775 99.06,104.775 100.33,104.775 101.6,104.775 102.87,104.775 104.14,104.775 105.41,104.775 114.173,104.775 115.443,104.775 116.713,104.775 117.983,104.775 119.253,104.775 120.523,104.775 121.793,104.775 123.063,104.775 124.333,104.775 125.603,104.775 143.637,105.156 93.98,106.045 95.25,106.045 96.52,106.045 97.79,106.045 99.06,106.045 100.33,106.045 101.6,106.045 102.87,106.045 104.14,106.045 105.41,106.045 114.173,106.045 115.443,106.045 116.713,106.045 117.983,106.045 119.253,106.045 120.523,106.045 121.793,106.045 123.063,106.045 124.333,106.045 125.603,106.045 143.637,106.426 93.98,107.315 95.25,107.315 96.52,107.315 97.79,107.315 99.06,107.315 100.33,107.315 101.6,107.315 102.87,107.315 104.14,107.315 105.41,107.315 114.173,107.315 115.443,107.315 116.713,107.315 117.983,107.315 119.253,107.315 120.523,107.315 121.793,107.315 123.063,107.315 124.333,107.315 125.603,107.315 143.637,107.696 93.98,108.585 95.25,108.585 96.52,108.585 97.79,108.585 99.06,108.585 100.33,108.585 101.6,108.585 102.87,108.585 104.14,108.585 105.41,108.585 114.173,108.585 115.443,108.585 116.713,108.585 117.983,108.585 119.253,108.585 120.523,108.585 121.793,108.585 123.063,108.585 124.333,108.585 125.603,108.585 143.637,108.966 143.637,110.236 143.637,111.506
"HEADPHONE L": J201.1
"HEADPHONE R": J201.2
IN1: U301.12 U701.1 | length 67.8
  F.Cu w0.2: U301.12 137.541,82.296 138.83,81.007 138.83,42.653 143.637,37.846 U701.1
IN2: U301.13 U701.2 | length 66
  F.Cu w0.2: U301.13 137.287,79.756 138.43,78.613 138.43,42.487 144.341,36.576 U701.2
IN3: U301.14 U701.3 | length 64.1
  F.Cu w0.2: U301.14 137.033,77.216 138.03,76.219 138.03,42.322 145.046,35.306 U701.3
IN4: U301.15 U701.4 | length 62.1
  F.Cu w0.2: U301.15 136.398,74.676 137.63,73.444 137.63,42.156 145.75,34.036 U701.4
IN5: U301.16 U701.5 | length 60.4
  F.Cu w0.2: U301.16 136.398,72.136 137.23,71.304 137.23,41.99 146.454,32.766 U701.5
INT: J601.1
M0: J401.1 U301.4 | length 78.5
  F.Cu w0.2: J401.1 102.2,55.21 102.2,90.465 v1(102.21,90.475) 102.2,90.484 v1@102.2,90.576 ; v1(102.21,96.012) 131.369,96.012 134.081,98.724 134.081,101.466 U301.4
  B.Cu w0.2: v1(102.21,90.475) v1(102.21,96.012) v1@102.21,96.063
M1: J401.2 U301.3 | length 88
  F.Cu w0.2: v1@99.72,90.424 v1(99.72,90.373) 99.72,55.206 100.958,53.968 103.498,53.968 J401.2 ; v1(99.72,95.809) 101.092,97.18 130.556,97.18 133.681,100.305 133.681,103.606 U301.3
  B.Cu w0.2: v1(99.72,90.373) v1(99.72,95.809) v1@99.72,95.961
MIC_LINE_IN: J201.4 U201.18
MISO: J601.4 U301.32 | length 172.1
  F.Cu w0.2: J601.4 77.724,125.171 79.146,126.594 144.018,126.594 147.371,123.241 v1(147.371,87.173)
  B.Cu w0.2: v1(147.371,87.173) 147.371,86.206 U301.32
MOSI: J601.3 U301.33 | length 180.2
  F.Cu w0.2: J601.3 75.184,125.527 77.267,127.61 144.221,127.61 147.98,123.85 147.98,107.544 ; 147.98,107.706 147.98,82.093 147.98,81.128 149.352,79.756 U301.33
Net-(C201-Pad1): RV201.2
Net-(D101-A): D101.2 R101.2
Net-(J701-Pin_1): J701.1 K701.NO | length 11.4
  F.Cu w0.8: K701.NO 180.091,21.405 J701.1
Net-(J701-Pin_2): J701.2 K701.NC | length 12.9
  F.Cu w0.8: J701.2 185.091,17.618 K701.NC
Net-(J701-Pin_4): J701.4 K702.NO | length 11
  F.Cu w0.8: J701.4 195.091,22.33 K702.NO
Net-(J701-Pin_5): J701.5 K702.NC | length 17.7
  F.Cu w0.8: J701.5 200.091,21.91 201.192,23.011 K702.NC
Net-(J701-Pin_7): J701.7 K703.NO | length 12.4
  F.Cu w0.8: J701.7 210.091,16.924 211.328,18.161 212.09,18.161 213.06,19.131 K703.NO
Net-(J701-Pin_8): J701.8 K703.NC | length 18.8
  F.Cu w0.8: J701.8 215.091,19.765 218.337,23.011 K703.NC
Net-(J702-Pin_1): J702.1 K704.NC | length 11.3
  F.Cu w0.8: J702.1 63.39,10.916 K704.NC
Net-(J702-Pin_2): J702.2 K704.NO | length 14.9
  F.Cu w0.8: J702.2 70.772,17.737 72.128,19.093 K704.NO
Net-(J702-Pin_4): J702.4 K705.NC | length 10.7
  F.Cu w0.8: J702.4 61.874,28.042 K705.NC
Net-(J702-Pin_5): J702.5 K705.NO | length 17.2
  F.Cu w0.8: J702.5 70.938,32.737 72.128,33.926 K705.NO
Net-(U201-AUD_OUT): RV201.3 U201.3
Net-(U201-AUDIO_ON): U201.1
Net-(U201-H{slash}L_PWR): SW201.2 U201.7
Net-(U201-PTT): SW201.3 U201.5
Net-(U701-O1): K701.COIL2 U701.18 | length 21.1
  F.Cu w0.5: U701.18 173.887,37.846 175.03,38.989 186.548,38.989 K701.COIL2@190.485,35.052
Net-(U701-O2): K702.COIL2 U701.17 | length 39.6
  F.Cu w0.5: U701.17 172.475,36.576 177.174,31.877 204.597,31.877 K702.COIL2@207.772,35.052
Net-(U701-O3): K703.COIL2 U701.16 | length 57.6
  F.Cu w0.5: U701.16 172.085,35.306 176.911,30.48 220.329,30.48 K703.COIL2
Net-(U701-O4): K704.COIL2 U701.15 | length 109.4
  F.Cu w0.5: U701.15 172.195,34.036 177.241,28.99 v1(177.241,27.127)
  B.Cu w0.5: K704.COIL2 90.903,17.491 146.726,17.491 152.908,23.673 173.736,23.673 177.19,27.127 v1(177.241,27.127) v1@177.241,27.178
Net-(U701-O5): K705.COIL2 U701.14 | length 101.8
  F.Cu w0.5: U701.14 172.212,32.766 175.92,29.058 v1(175.92,27.178)
  B.Cu w0.5: K705.COIL2 87.57,24.8 173.542,24.8 v1(175.92,27.178)
SCK: J601.2 U301.31 | length 178.4
  F.Cu w0.2: J601.2 72.644,125.019 76.251,128.626 144.17,128.626 148.641,124.155 148.641,85.852 149.657,84.836 U301.31
UART2_RX: U201.17 U301.29
UART2_TX: U201.16 U301.28 | length 10.5
  F.Cu w0.5: U301.28 157.988,92.456 v1(158.75,91.694)
  B.Cu w0.5: v1(158.75,91.694) v1(161.417,91.694)
unconnected-(SW201-A-Pad1): SW201.1
unconnected-(U102-NC-Pad4): U102.4
unconnected-(U201-NC-Pad2): U201.2
unconnected-(U201-NC-Pad4): U201.4
unconnected-(U201-NC-Pad11): U201.11
unconnected-(U201-NC-Pad13): U201.13
unconnected-(U201-NC-Pad14): U201.14
unconnected-(U201-NC-Pad15): U201.15
unconnected-(U301-3.3V-Pad38): U301.38
unconnected-(U301-5V-Pad18): U301.18
unconnected-(U301-PA0-Pad26): U301.26
unconnected-(U301-PA1-Pad27): U301.27
unconnected-(U301-PA8-Pad5): U301.5
unconnected-(U301-PA15-Pad10): U301.10
unconnected-(U301-PB0-Pad34): U301.34
unconnected-(U301-PB1-Pad35): U301.35
unconnected-(U301-PB2-Pad36): U301.36
unconnected-(U301-PB3-Pad11): U301.11
unconnected-(U301-PB9-Pad17): U301.17
unconnected-(U301-PB10-Pad37): U301.37
unconnected-(U301-PB12-Pad1): U301.1
unconnected-(U301-PB13-Pad2): U301.2
unconnected-(U301-PC13-Pad22): U301.22
unconnected-(U301-PC14-Pad23): U301.23
unconnected-(U301-PC15-Pad24): U301.24
unconnected-(U301-RST-Pad25): U301.25
unconnected-(U301-VBat-Pad21): U301.21
unconnected-(U701-I6-Pad6): U701.6
unconnected-(U701-I7-Pad7): U701.7
unconnected-(U701-I8-Pad8): U701.8
unconnected-(U701-O6-Pad13): U701.13
unconnected-(U701-O7-Pad12): U701.12
unconnected-(U701-O8-Pad11): U701.11
pads on no net: J401.12 J401.13 J401.14 U201.Un1 U201.Un2

## Polygon pours and split planes (outlines as drawn)
3.3V on F.Cu "F.Cu-3.3V" (solid, remove dead copper, pour order 29): 149.86,31.877 149.86,29.083 155.194,29.083 155.194,31.877
GNDD on F.Cu "F.Cu-GNDD-2" (solid, remove dead copper, pour order 19): 159.178,152.031 cw(c159.678,152.027) 159.678,152.527 236.884,152.502 cw(c236.884,152.002) 237.384,151.997 237.037,114.287 cw(c236.537,114.292) 236.537,113.792 159.356,113.792 cw(c159.356,114.292) 158.856,114.296
GNDD on F.Cu "F.Cu-GNDD-1" (solid, remove dead copper, pour order 18): 158.34,8.884 cw(c158.743,9.181) 158.243,9.183 158.367,39.507 cw(c158.867,39.505) 158.867,40.005 235.801,40.005 cw(c235.801,39.505) 236.301,39.509 236.647,0.732 cw(c236.147,0.728) 236.148,0.228 165.074,0.102 cw(c165.073,0.602) 164.67,0.305
GNDD on F.Cu "F.Cu-GNDD" (solid, remove dead copper, pour order 17): 47.213,134.625 ccw(c47.218,134.275) 46.868,134.27 48.89,0.446 ccw(c49.24,0.451) 49.239,0.101 160.736,0 ccw(c160.737,0.35) 161.087,0.351 160.985,135.941 ccw(c160.635,135.941) 160.63,136.291
5V on F.Cu "F.Cu-5V-2" (solid, remove dead copper, pour order 30): 130.81,35.501 ccw(c131.31,35.501) 131.31,35.001 141.486,35.001 ccw(c141.486,35.501) 141.986,35.501 141.986,40.343 ccw(c141.486,40.343) 141.486,40.843 131.31,40.843 ccw(c131.31,40.343) 130.81,40.343
5V on F.Cu "F.Cu-5V-1" (solid, remove dead copper, pour order 25): 149.098,29.972 149.098,31.623 141.351,31.623 141.351,29.972
GNDA on F.Cu "F.Cu-GNDA" (solid, remove dead copper, pour order 23): 175.597,69.373 208.82,69.373 212.376,72.319 220.809,72.319 220.809,63.937 212.376,63.937 208.82,66.68 198.66,66.68 175.546,66.68
+12V on F.Cu "F.Cu-+12V" (solid, remove dead copper, pour order 28): 172.245,28.346 cw(c172.245,27.846) 172.745,27.846 172.745,27.373 cw(c172.245,27.373) 172.245,26.873 167.81,26.873 cw(c167.81,27.373) 167.31,27.373 167.31,27.846 cw(c167.81,27.846) 167.81,28.346
Net-(D101-A) on F.Cu "F.Cu-Net-(D101-A)" (solid, remove dead copper, pour order 20): 133.573,15.875 ccw(c133.573,15.525) 133.223,15.525 133.223,13.939 ccw(c133.573,13.939) 133.573,13.589 138.715,13.589 ccw(c138.715,13.939) 139.065,13.939 139.065,14.89 ccw(c138.715,14.89) 138.715,15.24 136.87,15.24 cw(c136.87,15.59) 136.7,15.284 135.715,15.831 ccw(c135.545,15.525) 135.545,15.875
5V on F.Cu "F.Cu-5V" (solid, remove dead copper, pour order 22): 114.3,52.07 114.3,50.038 116.967,50.038 116.967,52.07
3.3V on B.Cu "B.Cu-3.3V" (solid, remove dead copper, pour order 27): 149.86,31.877 149.86,29.083 155.194,29.083 155.194,31.877
GNDD on B.Cu "B.Cu-GNDD-2" (solid, remove dead copper, pour order 16): 159.178,152.031 cw(c159.678,152.027) 159.678,152.527 236.884,152.502 cw(c236.884,152.002) 237.384,151.997 237.037,114.287 cw(c236.537,114.292) 236.537,113.792 159.356,113.792 cw(c159.356,114.292) 158.856,114.296
GNDD on B.Cu "B.Cu-GNDD-1" (solid, remove dead copper, pour order 15): 158.34,8.884 cw(c158.743,9.181) 158.243,9.183 158.367,39.507 cw(c158.867,39.505) 158.867,40.005 235.801,40.005 cw(c235.801,39.505) 236.301,39.509 236.647,0.732 cw(c236.147,0.728) 236.148,0.228 165.074,0.102 cw(c165.073,0.602) 164.67,0.305
GNDD on B.Cu "B.Cu-GNDD" (solid, remove dead copper, pour order 14): 47.213,134.625 ccw(c47.218,134.275) 46.868,134.27 48.89,0.446 ccw(c49.24,0.451) 49.239,0.101 160.736,0 ccw(c160.737,0.35) 161.087,0.351 160.985,135.941 ccw(c160.635,135.941) 160.63,136.291
5V on B.Cu "B.Cu-5V-1" (solid, remove dead copper, pour order 31): 130.81,35.501 ccw(c131.31,35.501) 131.31,35.001 141.486,35.001 ccw(c141.486,35.501) 141.986,35.501 141.986,40.343 ccw(c141.486,40.343) 141.486,40.843 131.31,40.843 ccw(c131.31,40.343) 130.81,40.343
5V on B.Cu "B.Cu-5V" (solid, remove dead copper, pour order 24): 149.098,29.972 149.098,31.623 141.351,31.623 141.351,29.972
GNDA on B.Cu "B.Cu-GNDA" (solid, remove dead copper, pour order 21): 175.597,69.373 208.82,69.373 212.376,72.319 220.809,72.319 220.809,63.937 212.376,63.937 208.82,66.68 198.66,66.68 175.546,66.68
+12V on B.Cu "B.Cu-+12V" (solid, remove dead copper, pour order 26): 172.245,28.346 cw(c172.245,27.846) 172.745,27.846 172.745,27.373 cw(c172.245,27.373) 172.245,26.873 167.81,26.873 cw(c167.81,27.373) 167.31,27.373 167.31,27.846 cw(c167.81,27.846) 167.81,28.346

## Keep-outs
Edge.Cuts:
  lines w0: 53.988,4.953 229.171,4.953 229.171,134.468 53.988,134.468 53.988,4.953
  lines w0.254: 53.988,4.953 229.171,4.953 229.171,134.468 53.988,134.468 53.988,4.953

## Silkscreen, mask and mechanical layers (free items; w line width, h text height)
F.SilkS:
  lines w0.254: 68.275,65.481 86.716,65.481 86.716,90.729 68.275,90.729 68.275,65.481
  text "©Tejas Karanji  / Designed 2025 / Version 1.10" at 202.489,115.746 h2
User.1:
  lines w0.254: 174.683,66.477 181.439,66.477

## Text inside footprints (layer, text, board x,y; h text height)
J401: F.SilkS "E32-433T33D" at 112.037,60.935 h2.18 r90
U101: F.Fab "REF**" at 111.859,28.56 h1
U301: F.Fab "REF**" at 143.906,80.363 h1 r90; Dwgs.User "Y@@J" at 148.104,106.106 h0.5 r90